# Altium PCB SFCslaver.PcbDoc (part 6 of 6)
Units mm, origin at the board's own origin, x right, y up, seen from the top; angles counter-clockwise.
Board outline 149.66 x 75.74 mm, 2 copper layers (Top Layer, Bottom Layer); 284 components, 212 nets, 830 pads, 310 vias.
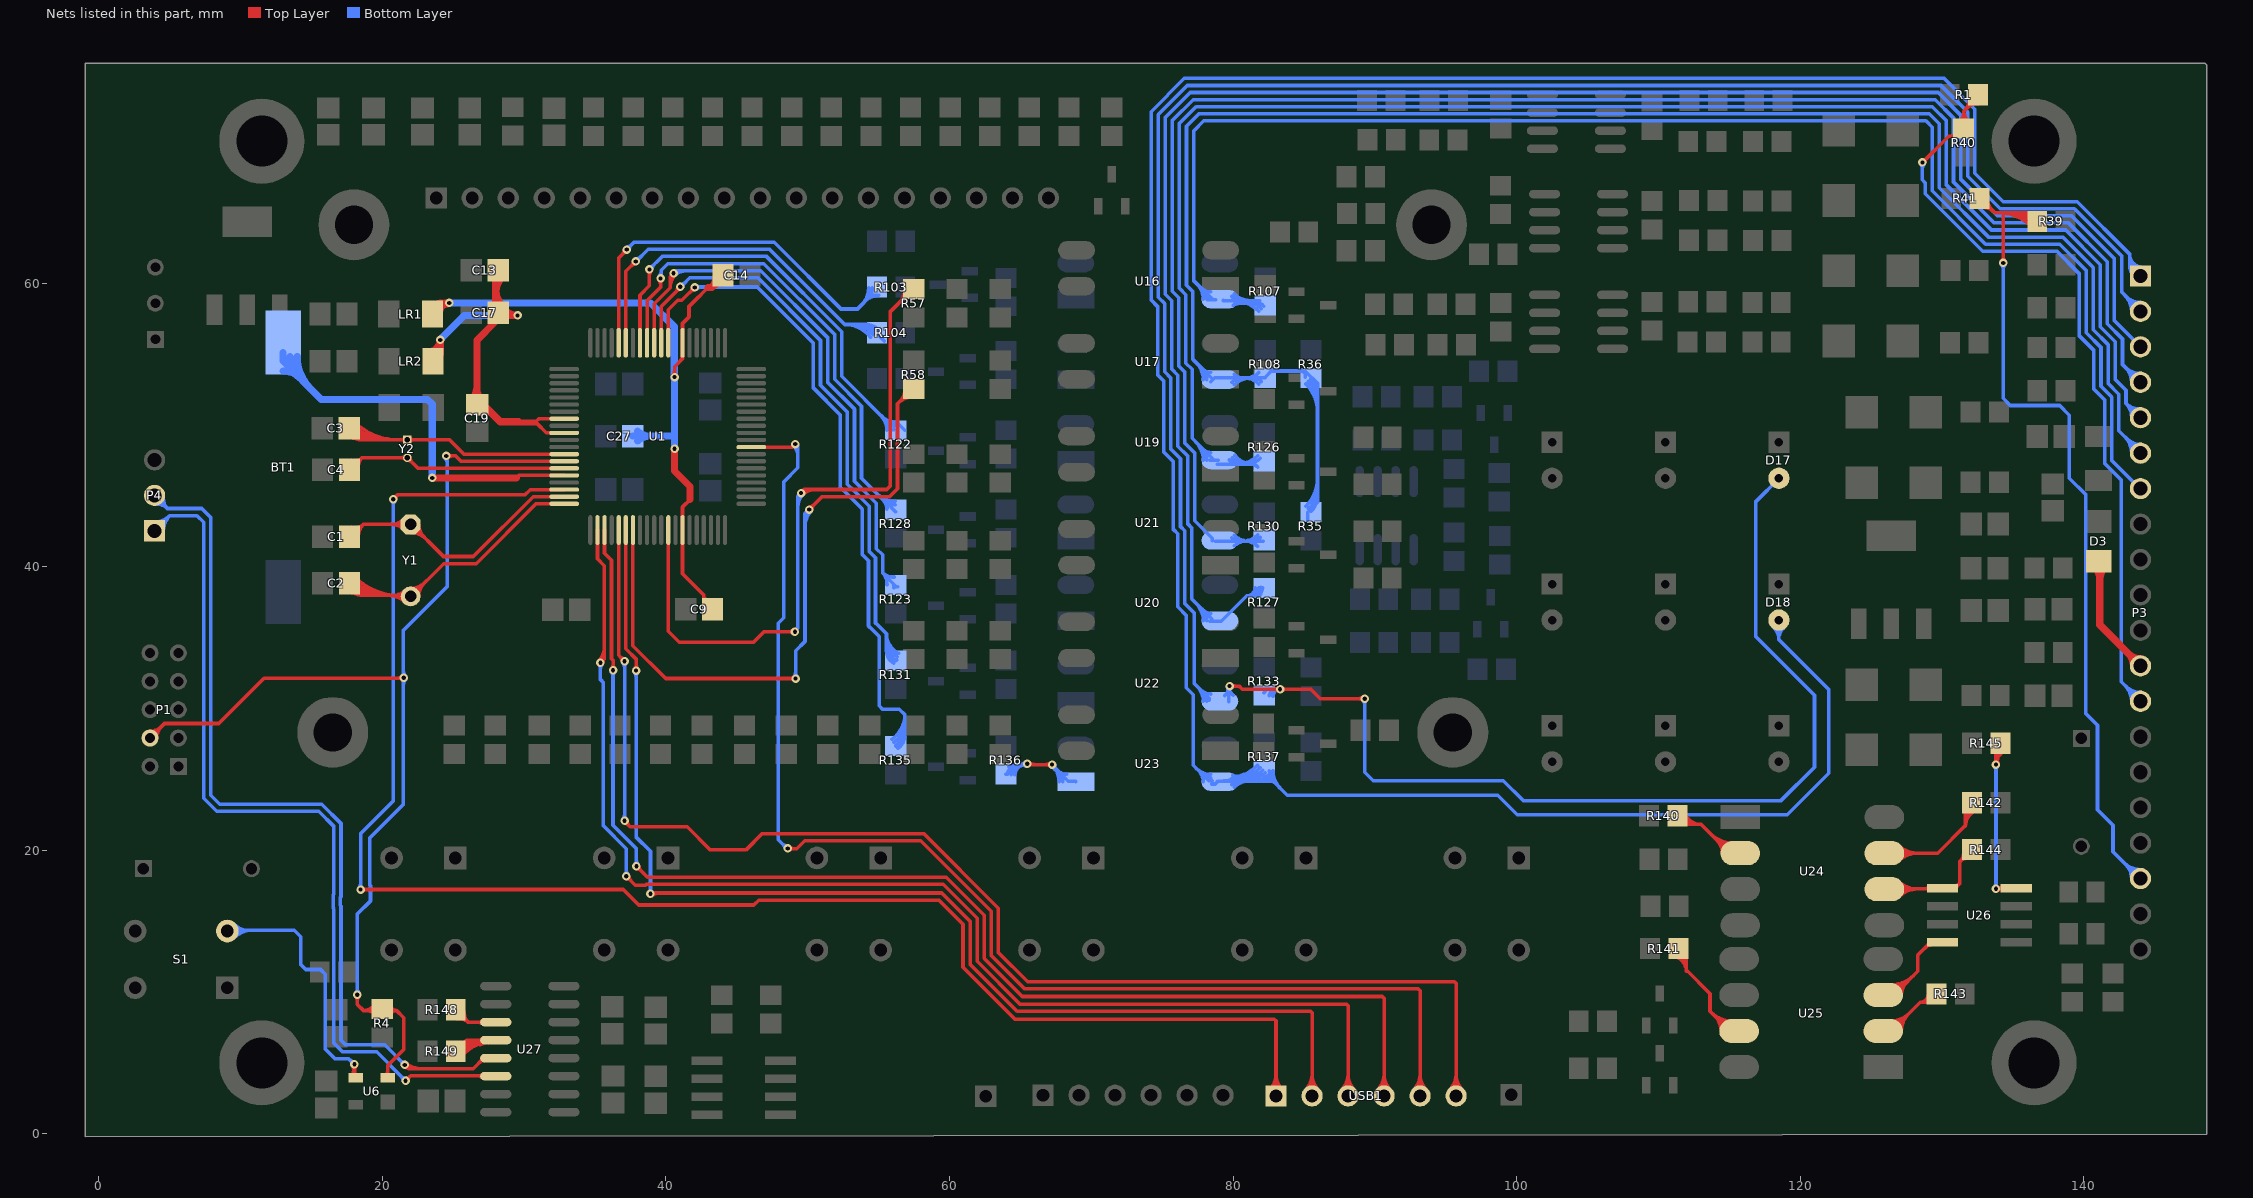
[diagram p6: the nets of this part, all layers, seen from the top]

## Via types
v1: diameter 0.6, hole 0.3, Top Layer to Bottom Layer, 310 vias

## Nets (pads, with @x,y where several pads share a name; then routed paths per layer and width w, separated by ;. In a path a pad name is that pad's centre, name@x,y a point inside that pad or via, vN(x,y) a via of type N, cw(c..) or ccw(c..) an arc to the next point about the centre after c; other vN are vias at no path point) (continued)
NetR136_2: R136.2 U23.1 | length 17.7
  Top Layer w0.254: v1@65.456,26.137 65.557,26.035 67.132,26.035 v1@67.208,26.111 ; v1@65.604,26.208 ccw(c66.021,26.626) 66.021,26.035 ; v1@67.111,25.913 ccw(c66.816,25.617) 66.816,26.035 ccw(c66.816,26.453) v1@67.111,26.157
  Bottom Layer w0.254: R136.2@63.984,25.344 64.104,25.344 64.821,26.06 ; R136.2@64.099,25.34 cw(c64.865,25.293) 64.865,26.06 ; R136.2@64.19,25.896 ccw(c64.365,26.517) 64.821,26.06 ; R136.2@64.353,25.325 cw(c65.135,25.277) 65.135,26.06 ; R136.2@64.603,25.418 cw(c65.363,25.518) 64.821,26.06 ; R136.2@64.606,25.309 cw(c65.405,25.26) v1@65.405,26.06 ; 65.002,26.06 ccw(c65.002,26.565) v1@65.359,26.208 ; 65.068,25.97 ccw(c64.955,26.389) v1@65.331,26.172 ; 65.09,25.976 cw(c65.194,25.588) v1@65.395,25.936 ; 65.125,26.06 cw(c65.125,25.729) v1@65.359,25.963 ; v1(65.481,26.086) 65.481,26.137 v1@65.405,26.06 ; v1@67.189,25.868 cw(c67.085,25.481) 67.432,25.681 ; v1@67.234,25.862 cw(c67.234,25.506) 67.486,25.758 ; v1(67.234,26.035) 67.183,26.035 67.132,26.086 67.234,26.086 67.234,26.01 68.377,24.867 68.885,24.867 68.912,24.839 U23.1@68.912,24.82 ; v1@67.255,25.988 cw(c66.087,24.82) U23.1@67.739,24.82 ; v1@67.401,25.99 ccw(c67.821,25.878) 67.444,25.661 ; v1@67.407,26.035 ccw(c67.886,26.035) 67.547,25.696 ; 67.645,25.599 ccw(c68.262,26.216) U23.1@68.262,25.343 ; 67.689,25.555 cw(c66.954,24.82) U23.1@67.993,24.82 ; 64.821,26.06 v1@65.405,26.06
NetR140_1: R140.1 U24.2 | length 14.3
  Top Layer w0.254: R140.1@111.162,22.309 ccw(c111.883,22.594) R140.1@111.883,21.819 ; R140.1@111.277,22.428 R140.1@111.338,22.428 111.947,21.819 113.005,21.819 ; R140.1@111.398,22.402 ccw(c112.257,22.742) 112.257,21.819 ; R140.1@111.634,22.496 ccw(c112.631,22.89) 112.631,21.819 ; R140.1@111.87,22.589 ccw(c113.005,23.039) 113.005,21.819 ; 113.67,21.153 ccw(c115.223,22.706) U24.2@115.223,20.51 ; 114.104,20.719 ccw(c115.223,21.838) U24.2@115.223,20.256 ; 114.121,20.702 cw(c113.205,19.787) U24.2@114.5,19.787 ; U24.2@115.773,19.787 115.037,19.787 113.005,21.819
NetR141_2: R141.2 U25.7 | length 16.9
  Top Layer w0.254: R141.2@111.235,12.461 cw(c110.906,11.456) 111.963,11.456 ; R141.2@111.314,12.702 cw(c111.021,11.807) 111.963,11.807 ; R141.2@111.394,12.944 cw(c111.136,12.158) 111.963,12.158 ; R141.2@111.414,13.056 111.963,12.506 111.963,11.557 113.64,9.881 113.64,8.636 115.062,7.214 115.57,7.214 U25.7@115.621,7.163 ; R141.2@111.473,13.185 cw(c111.251,12.508) R141.2@111.963,12.508 ; 113.724,8.551 ccw(c115.147,9.974) U25.7@115.147,7.962 ; 113.991,8.285 cw(c112.945,7.239) U25.7@114.424,7.239 ; 114.158,8.118 ccw(c115.147,9.107) U25.7@115.147,7.708 ; 114.424,7.851 cw(c113.812,7.239) U25.7@114.678,7.239
NetR142_2: R142.2 U24.7 | length 16.6
  Top Layer w0.254: U24.7@125.933,19.787 129.692,19.787 131.648,21.742 131.648,22.86 132.029,23.241 R142.2@132.41,23.241 ; U24.7@126.815,19.455 cw(c127.615,18.654) 127.615,19.787 cw(c127.615,20.919) U24.7@126.815,20.118 ; U24.7@126.994,19.275 cw(c128.229,18.041) 128.229,19.787 cw(c128.229,21.532) U24.7@126.994,20.298 ; 131.648,21.672 cw(c132.854,21.672) R142.2@132.357,22.77 ; 131.648,22.065 cw(c132.676,22.065) R142.2@132.253,23.002 ; 131.648,22.459 cw(c132.498,22.459) R142.2@132.148,23.233
NetR143_1: R143.1 U25.2 | length 12.4
  Top Layer w0.254: U25.2@125.857,7.315 126.492,7.315 126.594,7.214 126.416,7.214 128.473,9.271 ; U25.2@126.407,7.708 ccw(c126.407,8.923) 127.266,8.064 ; U25.2@126.407,7.962 ccw(c126.407,9.79) 127.7,8.497 ; U25.2@126.876,7.239 cw(c127.926,7.239) 127.183,7.981 ; U25.2@127.13,7.239 cw(c128.793,7.239) 127.617,8.415 ; 128.733,9.271 ccw(c128.733,9.826) R143.1@129.288,9.813 ; R143.1@128.993,9.271 ccw(c128.993,9.82) R143.1@129.542,9.807 ; R143.1@129.034,9.819 cw(c128.473,9.832) 128.473,9.271 ; R143.1@129.616,9.906 128.981,9.271 128.473,9.271
NetR144_2: R144.2 U24.6 U26.1 | length 15.7
  Top Layer w0.254: U24.6@125.933,17.247 126.467,17.247 126.492,17.272 U26.1@130.048,17.272 ; U24.6@126.815,16.915 cw(c127.677,16.053) 127.677,17.272 ; U24.6@126.815,17.578 ccw(c127.554,18.318) 127.554,17.272 ; U24.6@126.994,16.735 cw(c128.29,15.44) 128.29,17.272 ; U24.6@126.994,17.758 ccw(c128.167,18.931) 128.167,17.272 ; 128.76,17.272 ccw(c128.76,17.776) U26.1@129.116,17.42 ; 128.882,17.272 cw(c128.882,16.941) U26.1@129.116,17.175 ; U26.1@130.039,17.297 130.886,17.297 131.267,17.678 131.267,19.202 ; U26.1@130.839,17.47 ccw(c130.839,18.002) 131.215,17.626 ; U26.1@131.012,17.297 cw(c131.315,17.297) U26.1@131.101,17.512 ; R144.2@131.55,19.953 cw(c130.58,19.889) 131.267,19.202 ; R144.2@132.01,19.428 ccw(c131.851,18.619) 131.267,19.202 ; R144.2@132.105,20.041 131.267,19.202
NetR145_2: R145.2 U26.8 | length 19.1
  Top Layer w0.254: v1@133.685,26.157 ccw(c133.39,26.453) 133.807,26.453 ccw(c134.225,26.453) v1@133.93,26.157 ; v1@133.721,26.185 ccw(c133.497,26.572) 133.929,26.456 ; v1(133.807,17.272) 133.833,17.297 U26.8@135.239,17.297 ; v1@133.807,26.001 cw(c134.916,26.001) R145.2@134.392,26.979 ; v1(133.807,26.035) R145.2@133.807,27.559 ; 133.807,26.426 cw(c134.688,26.426) R145.2@134.272,27.202 ; R145.2@133.807,26.85 cw(c134.461,26.85) R145.2@134.152,27.426 ; 133.918,26.416 ccw(c134.293,26.315) v1@133.957,26.122 ; v1@133.923,17.401 ccw(c134.107,17.606) U26.8@134.178,17.34 ; v1@133.93,17.15 cw(c134.286,16.793) U26.8@134.286,17.297 ; v1@133.93,17.394 ccw(c134.164,17.628) U26.8@134.164,17.297 ; v1@133.957,17.186 cw(c134.228,17.029) U26.8@134.147,17.331 ; U26.8@134.316,17.175 ccw(c134.021,16.88) 134.021,17.297 ccw(c134.021,17.715) U26.8@134.316,17.42
  Bottom Layer w0.254: v1@133.685,17.394 ccw(c133.39,17.69) 133.807,17.69 ccw(c134.225,17.69) v1@133.93,17.394 ; v1@133.685,25.913 cw(c133.39,25.617) 133.807,25.617 cw(c134.225,25.617) v1@133.93,25.913 ; v1@133.807,17.221 v1(133.807,26.035)
NetR148_2: R148.2 U27.11 | length 6.3
  Top Layer w0.254: R148.2@25.181,8.738 26.07,7.849 ; R148.2@25.225,8.372 cw(c25.304,7.804) R148.2@25.709,8.209 ; R148.2@25.26,8.12 cw(c25.392,7.171) 26.07,7.849 ; R148.2@25.753,8.663 ccw(c26.836,8.615) 26.07,7.849 ; 26.725,7.849 ccw(c26.725,8.353) U27.11@27.081,7.996 ; 26.847,7.849 cw(c26.847,7.518) U27.11@27.081,7.752 ; U27.11@28.143,7.849 26.07,7.849
NetR149_2: R149.2 U27.12 | length 16.3
  Top Layer w0.254: R149.2@25.04,5.992 cw(c26.345,4.832) 26.345,6.579 ; R149.2@25.181,5.817 25.943,6.579 ; R149.2@25.229,5.823 cw(c26.911,4.33) U27.12@26.911,6.579 ; R149.2@25.334,6.419 ccw(c25.502,7.02) 25.943,6.579 ; R149.2@25.419,5.655 cw(c27.476,3.827) U27.12@27.476,6.579 ; R149.2@25.609,5.486 cw(c28.041,3.325) U27.12@28.041,6.579 ; R149.2@25.746,5.962 cw(c26.442,6.079) 25.943,6.579 ; 26.3,6.112 ccw(c25.979,7.311) U27.12@27.054,6.69 ; 26.608,6.361 ccw(c26.431,7.067) U27.12@27.055,6.693 ; 26.725,6.579 ccw(c26.725,7.083) U27.12@27.081,6.726 ; 26.728,6.547 cw(c26.814,6.051) U27.12@27.104,6.463 ; 26.848,6.568 ccw(c26.791,6.895) U27.12@27.062,6.704 ; 26.847,6.579 cw(c26.847,6.248) U27.12@27.081,6.482 ; 26.892,6.271 ccw(c26.73,6.878) U27.12@27.274,6.564 ; U27.12@27.485,6.429 ccw(c27.481,6.444) U27.12@27.494,6.437 ; U27.12@28.042,6.579 25.943,6.579
NetS1_2: S1.2 U6.3 | length 24.6
  Top Layer w0.254: U6.3@17.813,4.087 ccw(c17.28,4.62) v1@18.034,4.62 ; v1@17.891,4.805 cw(c17.45,4.504) 17.966,4.365 ; v1@17.912,4.78 cw(c17.616,4.485) 18.034,4.485 cw(c18.452,4.485) v1@18.156,4.78 ; U6.3@18.034,3.937 v1(18.034,4.902)
  Bottom Layer w0.254: S1.2@9.068,14.376 9.093,14.351 13.792,14.351 14.249,13.894 14.249,11.938 14.605,11.582 15.646,11.582 15.977,11.252 15.977,5.969 16.67,5.276 17.635,5.276 18.034,4.877 v1(18.034,4.902) ; S1.2@9.363,13.997 cw(c10.217,13.143) 10.217,14.351 ; S1.2@9.363,14.59 ccw(c9.94,15.167) 9.94,14.351 ; S1.2@9.542,13.818 cw(c10.83,12.53) 10.83,14.351 ; S1.2@9.542,14.769 ccw(c10.553,15.78) 10.553,14.351 ; 17.695,5.215 ccw(c18.034,5.554) v1@18.034,5.075 ; 17.757,5.154 cw(c17.505,4.902) v1@17.861,4.902
NetU25_3: U25.3 U26.4 | length 11.1
  Top Layer w0.254: U25.3@125.832,9.703 126.543,9.703 128.295,11.455 128.295,12.598 U26.4@129.184,13.487 ; U25.3@126.407,9.994 ccw(c126.407,11.025) 127.136,10.296 ; U25.3@126.407,10.248 ccw(c126.407,11.892) 127.57,10.73 ; U25.3@126.407,10.502 ccw(c126.407,12.759) 128.003,11.163 ; U25.3@127.13,9.779 cw(c128.364,9.779) 127.491,10.651 ; 128.851,13.154 cw(c129.239,12.765) U26.4@129.239,13.314 ; U26.4@128.982,13.285 ccw(c128.779,13.487) U26.4@129.066,13.487
PLUS_IN_CAP: R57.2 U1.32 | length 55.7
  Top Layer w0.254: U1.32@40.173,42.579 40.173,35.443 40.945,34.671 46.177,34.671 46.914,35.408 49.073,35.408 49.098,35.433 v1(49.098,35.408) ; v1@48.976,35.285 ccw(c48.681,34.99) 48.681,35.408 ccw(c48.681,35.825) v1@48.976,35.53 ; v1@49.473,45.244 cw(c49.931,44.786) 49.931,45.434 ; v1(49.53,45.187) 49.53,45.212 49.752,45.434 ; v1@49.546,45.359 ccw(c49.569,45.616) 49.752,45.434 ; v1@49.652,45.064 cw(c50.544,44.173) 50.544,45.434 ; v1@49.697,45.231 cw(c49.9,45.285) 49.752,45.434 ; 56.429,58.588 cw(c57.432,57.585) R57.2@57.432,59.004 ; 56.464,58.623 ccw(c55.51,59.577) R57.2@56.859,59.577 ; R57.2@56.863,59.022 cw(c57.432,58.453) R57.2@57.432,59.258 ; R57.2@56.898,59.057 ccw(c56.378,59.577) R57.2@57.113,59.577 ; R57.2@57.05,59.364 R57.2@57.634,59.364 ; R57.2@57.482,59.577 57.443,59.538 57.379,59.538 55.835,57.994 55.835,45.7 55.568,45.434 49.752,45.434
  Bottom Layer w0.254: v1@49.098,35.458 49.309,35.669 49.309,44.965 49.543,45.199 49.555,45.187 v1(49.53,45.187) ; 49.309,44.235 cw(c50.482,44.235) v1@49.652,45.064 ; 49.309,44.848 cw(c49.868,44.848) v1@49.473,45.244
PLUS_IN_PORT: P3.13 R1.1 R40.2 | length 64.1
  Top Layer w0.254: v1(128.626,68.504) 130.48,70.358 131.267,70.358 131.521,70.612 131.547,70.612 131.547,72.111 ; v1@128.626,68.677 ccw(c128.626,69.094) 128.921,68.799 ccw(c129.216,68.504) v1@128.799,68.504 ; R40.2@131.194,71.332 ccw(c130.511,72.111) 131.547,72.111 ; 131.771,72.335 cw(c132.547,71.559) R1.1@132.547,72.656 ; R40.2@131.919,71.356 cw(c132.497,72.111) 131.547,72.111 ; 131.956,72.52 ccw(c131.299,73.178) R1.1@132.228,73.216 ; R1.1@131.974,73.206 cw(c130.512,73.146) 131.547,72.111 ; R1.1@132.588,73.33 132.588,73.152 131.547,72.111
  Bottom Layer w0.254: v1@128.503,68.381 cw(c128.269,68.147) 128.6,68.147 ; 128.6,68.025 cw(c129.105,68.025) v1@128.748,68.381 ; v1@128.6,68.504 128.6,67.272 128.816,67.057 128.816,66.295 132.876,62.234 138.109,62.234 139.669,60.674 139.669,56.294 140.718,55.246 140.718,52.511 141.48,51.749 141.48,47.273 142.646,46.107 142.646,31.877 P3.13@144.023,30.5 ; v1@128.753,68.504 v1@128.778,68.529 ; 142.92,31.603 cw(c141.816,30.5) P3.13@143.377,30.5 ; 142.976,31.547 ccw(c144,32.571) P3.13@144,31.123 ; 143.354,31.17 cw(c142.684,30.5) P3.13@143.631,30.5 ; 143.41,31.113 ccw(c144,31.703) P3.13@144,30.869
PLUS_POWER_PORT: D3.2 P3.12 | length 12.9
  Top Layer w0.508: D3.2@140.76,39.997 cw(c139.886,39.122) 141.122,39.122 ; 141.122,39.007 cw(c142.522,39.007) D3.2@141.532,39.997 ; D3.2@141.122,40.792 141.122,35.89 P3.12@144.018,32.995 ; 143.144,33.868 cw(c142.276,33) P3.12@143.504,33 ; 143.175,33.838 ccw(c144,34.663) P3.12@144,33.496
RELAY_L1: R131.1 U1.70 | length 48.1
  Top Layer w0.254: U1.70@39.673,55.779 39.673,58.342 40.956,59.625 v1@41.046,59.625 ; 40.69,59.359 ccw(c40.308,59.741) v1@40.848,59.741 ; 40.812,59.481 cw(c41.021,59.273) v1@41.021,59.568
  Bottom Layer w0.254: v1@41.021,59.914 ccw(c41.021,60.454) 41.403,60.072 ; v1@41.034,59.627 41.034,59.703 41.693,60.362 46.492,60.362 50.903,55.951 50.903,52.796 52.799,50.9 52.799,45.812 53.281,45.33 53.281,45.328 54.347,44.262 54.347,41.061 54.785,40.623 54.785,36.02 ; v1@41.194,59.741 cw(c41.489,59.741) 41.28,59.949 ; 54.785,36.02 54.79,36.02 55.557,35.253 ; R131.1@55.557,34.031 ccw(c56.489,34.031) R131.1@56.079,33.194 ; 55.557,34.438 ccw(c56.689,34.438) R131.1@56.191,33.422 ; 55.557,34.845 ccw(c56.888,34.845) R131.1@56.302,33.65 ; R131.1@56.212,33.364 55.557,34.019 55.557,35.253 ; R131.1@56.276,33.418 R131.1@56.288,33.405 ; R131.1@56.414,33.878 cw(c57.088,35.253) 55.557,35.253
  other v1: 41.021,59.741
RELAY_L1_PORT: D17.2 P3.2 R133.1 U22.4 | length 212.3
  Top Layer w0.254: v1(79.756,31.572) 80.416,31.572 80.645,31.344 85.496,31.344 86.157,30.683 v1@89.306,30.683 ; v1@79.878,31.45 cw(c80.174,31.155) 80.174,31.572 cw(c80.174,31.99) v1@79.878,31.695 ; v1@83.19,31.221 ccw(c82.894,30.926) 82.894,31.344 ccw(c82.894,31.761) v1@83.19,31.466 ; v1@83.434,31.221 cw(c83.73,30.926) 83.73,31.344 cw(c83.73,31.761) v1@83.434,31.466 ; v1@89.159,30.561 ccw(c88.863,30.266) 88.863,30.683 ccw(c88.863,31.101) v1@89.159,30.806
  Bottom Layer w0.254: 77.457,31.56 cw(c76.39,30.493) U22.4@77.899,30.493 ; 77.704,31.313 ccw(c78.422,32.032) U22.4@78.422,31.016 ; 77.891,31.126 cw(c77.257,30.493) U22.4@78.153,30.493 ; U22.4@78.302,30.588 78.302,30.715 77.267,31.75 77.267,36.728 76.597,37.398 76.597,42.52 76.293,42.825 76.293,47.603 75.608,48.287 75.608,53.297 75.175,53.73 75.175,58.55 74.721,59.004 74.721,71.88 76.773,73.931 129.935,73.931 131.81,72.056 131.81,67.535 134.109,65.236 139.341,65.236 142.672,61.905 142.672,59.36 P3.2@144.014,58.018 ; U22.4@79.403,30.907 ccw(c78.93,31.521) v1@79.705,31.521 ; U22.4@79.591,31.094 cw(c80.113,30.955) v1@79.842,31.422 ; v1@79.606,31.486 cw(c79.351,31.338) 79.636,31.262 ; U22.4@79.705,30.455 v1@79.705,31.521 ; U22.4@79.705,31.032 cw(c80.296,31.032) v1@79.878,31.45 ; v1(79.756,31.572) v1@79.705,31.521 ; 79.775,31.262 cw(c79.912,31.299) v1@79.842,31.422 ; U22.4@80.019,30.923 cw(c80.432,31.521) v1@79.705,31.521 ; R133.1@82.169,31.09 82.423,31.344 v1(83.312,31.344) ccw(c83.312,30.848) R133.1@82.817,30.873 ; R133.1@82.563,30.886 cw(c83.045,30.861) v1@83.045,31.344 ; R133.1@82.919,31.31 cw(c82.986,31.06) v1@83.182,31.23 ; v1@83.19,31.221 ccw(c82.894,30.926) 82.894,31.344 ccw(c82.894,31.761) v1@83.19,31.466 ; v1@89.159,30.561 cw(c88.863,30.266) 89.281,30.266 cw(c89.699,30.266) v1@89.403,30.561 ; v1(89.281,30.683) 89.281,25.502 89.891,24.892 99.066,24.892 100.461,23.497 118.645,23.497 121.006,25.857 121.006,30.918 116.879,35.058 116.879,44.593 D17.2@118.514,46.228 ; 142.914,59.117 cw(c141.797,58) P3.2@143.377,58 ; 142.99,59.041 ccw(c144,60.051) P3.2@144,58.623 ; 143.348,58.684 cw(c142.664,58) P3.2@143.631,58 ; 143.424,58.608 ccw(c144,59.184) P3.2@144,58.369
RELAY_L2: R135.1 U1.69 | length 54.5
  Top Layer w0.254: U1.69@40.173,55.779 40.173,58.105 40.843,58.776 41.123,58.776 v1@42.05,59.703 ; v1@41.864,59.69 cw(c41.446,59.69) 41.742,59.395 cw(c42.037,59.099) v1@42.037,59.517
  Bottom Layer w0.254: v1@42.037,59.715 46.433,59.715 50.404,55.745 50.404,52.589 52.3,50.693 52.3,45.605 52.782,45.123 52.782,45.121 53.848,44.055 53.848,40.854 54.286,40.417 54.286,35.814 54.579,35.521 54.584,35.521 55.042,35.063 55.042,30.175 55.27,29.947 56.464,29.947 56.845,29.566 ; v1@42.159,59.568 cw(c42.516,59.211) 42.516,59.715 ; v1@42.159,59.812 ccw(c42.393,60.046) 42.393,59.715 ; R135.1@55.933,27.813 ccw(c54.706,29.566) 56.845,29.566 ; R135.1@56.079,27.605 ccw(c55.048,29.077) 56.845,29.077 ; R135.1@56.212,27.344 56.49,27.622 56.49,27.61 56.845,27.965 56.845,29.566 ; R135.1@56.225,27.397 ccw(c55.39,28.589) 56.845,28.589 ; R135.1@56.37,27.189 ccw(c55.731,28.101) 56.845,28.101
  other v1: 42.037,59.69
RELAY_L2_PORT: D18.2 P3.1 R137.1 U23.4 | length 223.6
  Bottom Layer w0.254: 77.414,25.76 ccw(c78.422,26.768) U23.4@78.422,25.343 ; 77.577,25.598 cw(c76.799,24.82) U23.4@77.899,24.82 ; 77.848,25.327 ccw(c78.422,25.901) U23.4@78.422,25.089 ; U23.4@78.488,24.668 78.742,24.668 78.945,24.871 82.825,24.871 ; U23.4@78.513,24.896 78.279,24.896 77.191,25.984 77.191,30.963 76.708,31.445 76.708,36.551 76.098,37.16 76.098,42.314 75.794,42.618 75.794,47.396 75.109,48.081 75.109,53.09 74.676,53.524 74.676,58.344 74.222,58.798 74.222,72.086 76.566,74.43 130.141,74.43 132.309,72.263 132.309,67.742 134.315,65.735 139.548,65.735 143.231,62.052 ; U23.4@79.016,24.871 ccw(c79.016,28.723) R137.1@81.739,25.999 ; U23.4@79.629,24.871 ccw(c79.629,28.109) R137.1@81.919,25.819 ; U23.4@79.883,25.036 ccw(c80.311,25.609) 80.433,24.904 ; U23.4@79.912,24.63 cw(c80.494,24.048) 80.494,24.871 ; U23.4@79.951,24.679 cw(c80.712,24.213) 80.504,25.081 ; U23.4@79.96,24.695 cw(c81.102,24.093) 80.768,25.34 ; U23.4@79.984,25.273 ccw(c80.219,25.681) 80.341,25.226 ; U23.4@79.995,25.266 ccw(c80.528,26.135) 80.766,25.144 ; U23.4@80.035,25.239 ccw(c80.798,26.261) 81.015,25.004 ; U23.4@80.092,24.45 cw(c81.107,23.435) 81.107,24.871 ; U23.4@80.092,25.19 ccw(c80.862,25.96) 80.862,24.871 ; U23.4@80.149,24.518 cw(c81.074,23.866) 80.882,24.981 ; U23.4@80.168,24.547 cw(c81.451,23.76) 81.1,25.224 ; U23.4@80.242,24.871 ccw(c80.242,27.496) R137.1@82.098,25.64 ; 80.855,24.871 ccw(c80.855,26.883) R137.1@82.278,25.46 ; 81.468,24.871 ccw(c81.468,26.27) R137.1@82.458,25.281 ; 82.082,24.871 ccw(c82.082,25.657) R137.1@82.637,25.101 ; R137.1@82.244,25.021 cw(c82.244,23.981) 82.98,24.716 ; R137.1@82.337,25.028 cw(c82.427,24.473) 82.825,24.871 ; R137.1@82.563,25.594 ccw(c83.677,25.594) 82.89,24.806 ; 82.695,24.871 ccw(c82.695,25.043) R137.1@82.817,24.921 ; R137.1@82.754,25.331 ccw(c83.104,25.15) 82.825,24.871 ; R137.1@82.817,25.594 ccw(c84.544,25.594) 83.323,24.373 ; D18.2@118.084,35.766 cw(c117.272,34.86) 118.489,34.86 ; D18.2@118.254,35.955 cw(c117.782,35.429) 118.489,35.429 ; 118.489,35.409 cw(c119.197,35.409) D18.2@118.739,35.949 ; D18.2@118.489,36.199 118.489,34.86 ; D18.2@118.903,35.755 ccw(c119.662,34.86) 118.489,34.86 ; 143.231,61.203 ccw(c144.076,61.203) P3.1@143.985,60.362 ; 143.231,61.486 ccw(c144.107,61.486) P3.1@144.012,60.614 ; 143.231,61.769 ccw(c144.138,61.769) P3.1@144.04,60.867 ; P3.1@143.397,60.656 ccw(c142.781,60.815) 143.231,61.265 ; P3.1@143.839,61.102 cw(c143.676,61.71) 143.231,61.265 ; P3.1@143.993,60.503 143.231,61.265 ; P3.1@144.067,61.119 cw(c144.169,62.052) 143.231,62.052 ; 82.825,24.871 83.829,23.867 98.679,23.867 100.048,22.499 119.095,22.499 122.022,25.425 122.022,31.327 118.489,34.86 ; 143.231,61.265 143.231,62.052
RELAY_M1: R103.1 U1.76 | length 31.5
  Top Layer w0.254: U1.76@36.673,55.779 36.673,61.768 37.236,62.332 v1(37.236,62.357) ; 36.923,62.018 ccw(c36.584,62.357) v1@37.063,62.357 ; 36.984,62.08 cw(c37.236,61.828) v1@37.236,62.184
  Bottom Layer w0.254: v1(37.236,62.357) 37.752,62.872 47.643,62.872 52.349,58.166 53.518,58.166 54.483,59.131 R103.1@54.991,59.131 ; v1@37.236,62.53 ccw(c37.236,62.948) 37.532,62.652 ccw(c37.827,62.357) v1@37.409,62.357 ; 53.805,58.453 ccw(c52.592,59.665) R103.1@54.307,59.665 ; 54.136,58.784 cw(c54.88,58.04) R103.1@54.88,59.092 ; 54.238,58.887 ccw(c53.46,59.665) R103.1@54.561,59.665
RELAY_M1_PORT: P3.7 R107.1 U16.4 | length 116
  Bottom Layer w0.254: 77.447,59.948 cw(c76.355,58.856) U16.4@77.899,58.856 ; 77.728,59.666 ccw(c78.422,60.36) U16.4@78.422,59.379 ; 77.88,59.514 cw(c77.222,58.856) U16.4@78.153,58.856 ; U16.4@78.183,58.831 U16.4@78.767,58.831 ; U16.4@78.513,58.881 77.216,60.179 77.216,70.714 77.939,71.436 128.868,71.436 129.315,70.99 129.315,66.502 133.075,62.741 138.307,62.741 140.168,60.881 140.168,56.501 141.217,55.452 141.217,52.718 141.979,51.956 141.979,47.48 143.993,45.466 P3.7@144.501,45.466 ; U16.4@79.301,58.78 79.326,58.754 R107.1@81.891,58.754 ; U16.4@79.912,59.046 ccw(c80.617,59.751) 80.617,58.754 ; U16.4@79.949,59 ccw(c80.603,59.412) 80.433,58.658 ; U16.4@80.001,58.414 cw(c80.609,57.451) 80.86,58.562 ; U16.4@80.007,58.754 cw(c80.007,56.197) R107.1@81.815,58.005 ; U16.4@80.092,58.486 cw(c80.739,57.839) 80.739,58.754 ; U16.4@80.092,59.226 ccw(c81.23,60.364) 81.23,58.754 ; U16.4@80.164,59.135 ccw(c81.336,59.875) 81.031,58.523 ; 80.62,58.754 cw(c80.62,56.81) R107.1@81.995,58.185 ; 81.234,58.754 cw(c81.234,57.424) R107.1@82.175,58.365
RELAY_M2: R104.1 U1.75 | length 34.1
  Top Layer w0.254: U1.75@37.173,55.779 37.173,60.82 v1@37.884,61.531 ; v1@37.698,61.519 cw(c37.281,61.519) 37.576,61.223 cw(c37.871,60.928) v1@37.871,61.346 ; v1@37.846,61.544 v1@37.871,61.544
  Bottom Layer w0.254: v1@37.871,61.692 ccw(c37.871,62.171) 38.21,61.832 ; v1@37.897,61.519 38.751,62.373 47.304,62.373 52.603,57.074 ; v1@38.044,61.519 cw(c38.401,61.519) 38.149,61.771 ; 53.126,57.074 cw(c53.126,55.163) R104.1@54.629,56.343 ; 53.648,57.074 cw(c53.648,55.573) R104.1@54.829,56.499 ; 54.17,57.074 cw(c54.17,55.983) R104.1@55.029,56.656 ; R104.1@54.429,56.186 ccw(c52.604,54.753) 52.604,57.074 ; R104.1@55.393,55.911 54.23,57.074 52.603,57.074
  other v1: 37.871,61.519
RELAY_M2_PORT: P3.6 R35.1 R36.2 R108.1 U17.4 | length 145.5
  Bottom Layer w0.254: 77.405,54.376 cw(c76.212,53.183) U17.4@77.899,53.183 ; 77.829,53.952 ccw(c78.422,54.544) U17.4@78.422,53.706 ; 77.838,53.943 cw(c77.079,53.183) U17.4@78.153,53.183 ; U17.4@78.437,53.039 78.712,53.315 R108.1@82.271,53.315 ; U17.4@78.564,53.217 77.171,54.61 77.171,59.377 76.717,59.831 76.717,71.053 77.6,71.935 129.108,71.935 129.814,71.23 129.814,66.708 133.282,63.24 138.514,63.24 140.667,61.088 140.667,56.708 141.716,55.659 141.716,52.925 142.478,52.163 142.478,49.572 P3.6@144.065,47.985 ; U17.4@79.912,52.993 cw(c80.688,52.217) 80.688,53.315 ; U17.4@80.092,52.814 cw(c81.302,51.604) 81.302,53.315 ; U17.4@80.092,53.553 ccw(c80.668,54.129) 80.668,53.315 ; 80.753,53.315 cw(c80.753,51.812) R108.1@81.815,52.875 ; 80.921,53.315 ccw(c80.921,54.579) R108.1@81.815,53.685 ; 81.366,53.315 cw(c81.366,52.426) R108.1@81.995,53.054 ; R108.1@82.296,53.391 82.702,53.797 84.887,53.797 85.09,53.594 R36.2@85.09,53.34 ; R36.2@85.103,53.785 85.954,52.934 85.954,44.526 85.258,43.831 R35.1@85.258,43.256 ; R35.1@85.141,44.255 ccw(c83.18,46.216) 85.954,46.216 ; R36.2@85.141,52.875 cw(c83.18,50.913) 85.954,50.913 ; R35.1@85.321,44.075 ccw(c83.793,45.603) 85.954,45.603 ; R36.2@85.321,53.054 cw(c83.793,51.527) 85.954,51.527 ; R35.1@85.5,43.896 ccw(c84.406,44.99) 85.954,44.99 ; R36.2@85.5,53.234 cw(c84.406,52.14) 85.954,52.14 ; 142.902,49.148 cw(c141.754,48) P3.6@143.377,48 ; 143.021,49.029 ccw(c144,50.008) P3.6@144,48.623 ; 143.335,48.714 cw(c142.621,48) P3.6@143.631,48 ; 143.454,48.595 ccw(c144,49.141) P3.6@144,48.369
RELAY_S1: R122.1 U1.73 | length 35.6
  Top Layer w0.254: U1.73@38.173,55.779 38.173,59.135 38.837,59.799 v1(38.837,60.96) ; v1@38.714,60.838 cw(c38.419,60.542) 38.837,60.542 cw(c39.254,60.542) v1@38.959,60.838
  Bottom Layer w0.254: v1(38.837,60.96) 39.751,61.874 47.097,61.874 52.4,56.571 52.4,53.416 55.632,50.184 55.632,49.962 55.923,49.671 R122.1@56.11,49.671 ; v1@38.837,61.133 ccw(c38.837,61.551) 39.132,61.255 ccw(c39.427,60.96) v1@39.01,60.96 ; 55.159,50.657 cw(c54.122,49.62) R122.1@55.589,49.62 ; 55.243,50.574 ccw(c56.162,51.493) R122.1@56.162,50.193 ; R122.1@55.593,50.223 cw(c54.989,49.62) R122.1@55.843,49.62 ; R122.1@55.676,50.14 ccw(c56.162,50.625) R122.1@56.162,49.939 ; R122.1@56.288,50.118 56.339,50.118 R122.1@56.838,49.62
RELAY_S1_PORT: P3.5 R126.1 U19.4 | length 126
  Bottom Layer w0.254: 77.363,48.805 cw(c76.069,47.511) U19.4@77.899,47.511 ; 77.797,48.371 cw(c76.936,47.511) U19.4@78.153,47.511 ; 77.931,48.237 ccw(c78.422,48.729) U19.4@78.422,48.034 ; U19.4@78.378,47.485 U19.4@78.767,47.485 ; U19.4@78.894,47.223 81.383,47.223 ; U19.4@78.97,47.502 78.666,47.502 77.114,49.053 77.114,53.908 76.672,54.351 76.672,59.171 76.218,59.625 76.218,71.259 77.393,72.434 129.314,72.434 130.313,71.436 130.313,66.915 133.488,63.739 138.721,63.739 141.166,61.294 141.166,56.914 142.215,55.866 142.215,53.188 142.977,52.426 142.977,51.511 ; U19.4@79.734,47.52 ccw(c80.343,47.995) 80.343,47.223 ; U19.4@79.934,47.676 ccw(c80.863,48.401) 80.863,47.223 ; U19.4@80.134,47.832 ccw(c81.383,48.807) 81.383,47.223 ; U19.4@80.293,47.223 ccw(c80.293,49.268) R126.1@81.739,47.822 ; 80.906,47.223 ccw(c80.906,48.655) R126.1@81.919,47.642 ; 81.229,47.223 cw(c81.229,46.501) R126.1@81.739,47.011 ; R126.1@81.687,47.072 ccw(c81.383,46.843) 81.383,47.223 ; P3.5@143.377,50.514 ccw(c142.009,50.543) 142.977,51.511 ; 143.386,51.102 ccw(c143.951,51.667) P3.5@143.984,50.869 ; 143.397,51.091 cw(c142.832,50.526) P3.5@143.631,50.508 ; P3.5@143.974,51.122 cw(c143.918,52.452) 142.977,51.511 ; P3.5@144.065,50.423 142.977,51.511
RELAY_S2: R128.1 U1.72 | length 39.7
  Top Layer w0.254: U1.72@38.673,55.779 38.673,58.753 39.624,59.704 v1(39.624,60.325) ; v1@39.502,60.203 cw(c39.206,59.907) 39.624,59.907 cw(c40.042,59.907) v1@39.746,60.203
  Bottom Layer w0.254: v1@39.502,60.447 ccw(c39.084,60.865) 39.675,60.865 ; v1(39.624,60.325) 39.649,60.325 39.675,60.3 39.675,60.909 40.126,61.36 46.906,61.36 51.901,56.365 51.901,53.21 53.797,51.314 53.797,46.225 54.231,45.792 54.234,45.792 55.423,44.602 ; 54.896,45.129 ccw(c56.162,46.395) R128.1@56.162,44.605 ; 55.303,44.722 cw(c54.613,44.032) R128.1@55.589,44.032 ; 55.33,44.696 ccw(c56.162,45.528) R128.1@56.162,44.351 ; R128.1@55.594,44.104 ccw(c54.999,44.179) 55.423,44.602 ; R128.1@55.888,44.535 cw(c55.7,44.88) 55.423,44.602 ; R128.1@56.212,43.854 55.464,44.602 55.423,44.602
RELAY_S2_PORT: P3.4 R130.1 U21.4 | length 126.9
  Bottom Layer w0.254: U21.4@78.539,41.838 78.539,41.99 77.291,43.238 77.291,48.016 76.606,48.701 76.606,53.71 76.173,54.144 76.173,58.964 75.719,59.418 75.719,71.466 77.186,72.933 129.521,72.933 130.812,71.643 130.812,67.122 133.695,64.238 138.928,64.238 141.665,61.501 141.665,57.121 142.732,56.054 142.732,54.245 P3.4@143.963,53.014 ; U21.4@78.742,41.787 R130.1@82.144,41.787 ; U21.4@79.912,42.028 ccw(c80.494,42.61) 80.494,41.787 ; U21.4@80.092,41.468 cw(c80.862,40.698) 80.862,41.787 cw(c80.861,40.545) R130.1@81.739,41.423 ; U21.4@80.092,42.208 ccw(c81.107,43.223) 81.107,41.787 ; 80.661,41.787 ccw(c80.661,43.312) R130.1@81.739,42.234 ; 81.274,41.787 ccw(c81.274,42.699) R130.1@81.919,42.054 ; 142.897,54.08 ccw(c144,55.183) P3.4@144,53.623 ; 142.953,54.024 cw(c141.928,53) P3.4@143.377,53 ; 143.331,53.646 ccw(c144,54.315) P3.4@144,53.369 ; 143.386,53.591 cw(c142.796,53) P3.4@143.631,53
RELAY_S3: R123.1 U1.71 | length 42.7
  Top Layer w0.254: U1.71@39.173,55.779 39.173,58.547 40.301,59.675 40.301,60.418 v1@40.551,60.668 ; 40.301,59.689 cw(c41.53,59.689) v1@40.661,60.558 ; 40.301,60.303 cw(c40.916,60.303) v1@40.481,60.738 ; v1@40.369,60.646 cw(c40.124,60.595) 40.301,60.418 cw(c40.519,60.199) v1@40.531,60.508
  Bottom Layer w0.254: v1(40.538,60.681) 40.719,60.861 46.699,60.861 51.402,56.158 51.402,53.003 53.298,51.107 53.298,46.019 53.78,45.537 53.78,45.535 54.846,44.469 54.846,41.268 55.284,40.83 55.284,39.56 ; v1@40.661,60.558 cw(c41.392,59.827) 41.392,60.861 ; R123.1@55.59,38.738 ccw(c54.537,38.813) 55.284,39.56 ; R123.1@56.085,38.52 R123.1@56.085,38.638 ; R123.1@56.104,39.268 cw(c56.001,40.278) 55.284,39.56 ; R123.1@56.339,38.587 56.257,38.587 55.284,39.56
RELAY_S3_PORT: P3.3 R127.1 U20.4 | length 129.5
  Bottom Layer w0.254: 77.369,37.445 cw(c76.089,36.165) U20.4@77.899,36.165 ; 77.803,37.011 cw(c76.956,36.165) U20.4@78.153,36.165 ; 77.916,36.898 ccw(c78.422,37.404) U20.4@78.422,36.688 ; U20.4@78.344,36.14 79.168,36.14 80.975,37.948 ; U20.4@78.488,36.199 78.488,36.326 77.096,37.718 77.096,42.727 76.792,43.032 76.792,47.81 76.107,48.494 76.107,53.504 75.674,53.937 75.674,58.757 75.22,59.211 75.22,71.673 76.98,73.432 129.728,73.432 131.311,71.85 131.311,67.328 133.902,64.737 139.134,64.737 142.164,61.708 142.164,57.328 P3.3@144.043,55.448 ; 81.24,37.948 ccw(c81.24,38.533) R127.1@81.826,38.508 ; R127.1@81.506,37.948 ccw(c81.506,38.522) R127.1@82.079,38.497 ; R127.1@81.572,38.519 cw(c80.975,38.545) 80.975,37.948 ; R127.1@81.966,38.532 81.966,38.075 81.839,37.948 80.975,37.948
RMT_DEBUG: R58.2 U1.27 | length 54.7
  Top Layer w0.254: U1.27@37.673,42.579 37.673,34.415 39.982,32.106 v1(49.149,32.106) ; v1@49.027,31.983 ccw(c48.731,31.688) 48.731,32.106 ccw(c48.731,32.523) v1@49.027,32.228 ; v1@50.089,44.018 51.005,44.935 55.775,44.935 56.334,45.494 56.334,51.483 57.357,52.506 R58.2@57.531,52.506 ; v1@50.114,44.191 ccw(c50.114,44.548) 50.366,44.296 ; v1@50.287,44.018 cw(c50.766,44.018) 50.427,44.357 ; 56.354,51.502 cw(c57.432,50.424) R58.2@57.432,51.949 ; 56.495,51.644 ccw(c55.617,52.522) R58.2@56.859,52.522 ; R58.2@56.787,51.936 cw(c57.432,51.291) R58.2@57.432,52.203
  Bottom Layer w0.254: v1@49.027,32.228 ccw(c48.731,32.523) 49.149,32.523 ccw(c49.567,32.523) v1@49.271,32.228 ; v1@49.149,32.08 49.149,34.061 49.808,34.72 49.808,43.737 ; 49.808,42.861 cw(c51.272,42.861) v1@50.237,43.896 ; 49.808,43.474 cw(c50.658,43.474) v1@50.057,44.075 ; 49.837,43.766 ccw(c49.585,44.018) v1@49.941,44.018 ; v1@50.101,43.846 ccw(c50.072,43.473) 49.808,43.737 ; v1(50.114,44.018) 50.114,44.044 49.808,43.737
RMT_DEBUG_PORT: P3.18 R39.1 R41.2 | length 72.8
  Top Layer w0.254: R41.2@132.65,65.968 132.717,65.968 133.733,64.952 ; R41.2@132.671,65.6 cw(c132.726,64.739) R41.2@133.336,65.349 ; R41.2@132.687,65.346 cw(c132.774,63.994) 133.733,64.952 ; R41.2@133.223,65.918 ccw(c134.324,65.918) 133.546,65.139 ; 133.986,64.952 cw(c133.986,61.658) R39.1@136.315,63.987 ; v1@134.193,61.54 ccw(c133.893,61.839) 134.317,61.839 ; 134.315,64.897 134.315,62.719 134.317,62.717 v1@134.317,61.371 ; 134.317,61.831 ccw(c134.729,61.831) v1@134.438,61.54 ; 134.599,64.952 cw(c134.599,62.271) R39.1@136.495,64.167 ; 135.213,64.952 cw(c135.213,62.884) R39.1@136.675,64.346 ; 135.826,64.952 cw(c135.826,63.498) R39.1@136.854,64.526 ; R39.1@136.035,64.952 133.733,64.952 ; R39.1@136.578,64.266 R39.1@136.755,64.266 ; R39.1@136.721,64.342 R39.1@136.721,64.927
  Bottom Layer w0.254: v1@134.193,61.295 cw(c133.893,60.995) 134.317,60.995 ; 134.317,61.004 cw(c134.729,61.004) v1@134.438,61.295 ; v1@134.317,61.421 134.317,51.865 134.823,51.359 138.303,51.359 138.985,50.677 138.985,46.24 140.151,45.073 140.151,29.619 140.972,28.799 140.972,23.062 140.97,23.06 140.97,22.84 142.062,21.748 142.062,19.888 P3.18@143.95,18 ; 142.852,19.099 ccw(c144,20.247) P3.18@144,18.623 ; 142.972,18.979 cw(c141.993,18) P3.18@143.377,18 ; 143.285,18.665 ccw(c144,19.38) P3.18@144,18.369 ; 143.405,18.545 cw(c142.86,18) P3.18@143.631,18
  other v1: 134.315,61.417
RS232_RXD: P4.2 U27.13 | length 68.2
  Top Layer w0.254: v1@21.533,4.794 ccw(c22.029,5.291) 22.029,4.588 ; v1(21.59,4.851) 21.853,4.588 ; v1@21.605,4.679 cw(c21.631,4.367) 21.853,4.588 ; v1@21.712,4.974 ccw(c22.643,5.904) 22.643,4.588 ; v1@21.762,4.837 ccw(c22.075,4.81) 21.853,4.588 ; 26.821,5.002 cw(c27.204,4.62) U27.13@27.204,5.161 ; 26.945,5.126 ccw(c26.737,5.334) U27.13@27.031,5.334 ; U27.13@28.004,5.334 27.153,5.334 26.407,4.588 21.853,4.588
  Bottom Layer w0.254: P4.2@3.937,45.009 4.851,44.094 ; P4.2@3.973,44.652 cw(c4.034,44.036) 4.472,44.474 ; P4.2@3.998,44.4 cw(c4.102,43.345) 4.851,44.094 ; P4.2@4.303,44.976 ccw(c4.92,44.904) 4.481,44.465 ; P4.2@4.556,44.947 ccw(c5.582,44.825) 4.851,44.094 ; v1@21.417,4.851 ccw(c20.999,4.851) 21.295,5.147 ccw(c21.59,5.442) v1@21.59,5.024 ; v1@21.641,4.699 21.641,4.801 v1(21.59,4.851) 20.168,6.274 17.399,6.274 17.085,6.588 17.085,16.051 17.032,16.105 17.032,16.661 17.085,16.715 17.085,21.878 15.723,23.241 8.534,23.241 7.899,23.876 7.899,43.459 7.264,44.094 4.851,44.094
RS232_TXD: P4.1 U27.14 | length 67.3
  Top Layer w0.254: v1(21.641,3.734) 21.996,4.089 27.127,4.089 27.153,4.064 U27.14@28.004,4.064 ; v1@21.641,3.907 ccw(c21.641,4.324) 21.936,4.029 ccw(c22.231,3.734) v1@21.814,3.734 ; 26.725,4.089 cw(c26.725,3.585) U27.14@27.081,3.942 ; 26.847,4.089 ccw(c26.847,4.42) U27.14@27.081,4.186
  Bottom Layer w0.254: P4.1@3.912,42.545 3.962,42.545 5.013,43.595 6.925,43.595 7.4,43.12 7.4,23.669 8.328,22.742 15.516,22.742 16.586,21.672 16.586,16.921 16.533,16.868 16.533,15.898 16.586,15.845 16.586,6.381 17.192,5.775 19.6,5.775 v1(21.641,3.734) ; P4.1@3.937,42.889 ccw(c3.937,43.779) 4.567,43.15 ccw(c5.197,42.52) P4.1@4.306,42.52 ; P4.1@3.937,43.143 ccw(c3.937,44.647) 5.001,43.583 ccw(c6.064,42.52) P4.1@4.56,42.52 ; v1@21.468,3.734 ccw(c21.05,3.734) 21.345,4.029 ccw(c21.641,4.324) v1@21.641,3.907
RTCX1: C3.1 U1.13 Y2.1 | length 29.9
  Top Layer w0.254: C3.1@17.385,49.431 ccw(c18.556,50.601) 18.556,48.946 ; C3.1@17.565,49.61 ccw(c19.169,51.215) 19.169,48.946 ; C3.1@17.653,49.759 18.466,48.946 ; C3.1@17.745,49.79 ccw(c19.782,51.828) 19.782,48.946 ; C3.1@17.834,49.11 cw(c18.011,48.491) 18.466,48.946 ; C3.1@17.924,49.97 ccw(c20.396,52.441) 20.396,48.946 ; C3.1@18.104,50.149 ccw(c21.009,53.054) 21.009,48.946 ; C3.1@18.274,49.584 ccw(c18.964,49.444) 18.466,48.946 ; Y2.1@21.645,48.823 ccw(c21.35,48.528) 21.35,48.946 ccw(c21.35,49.363) Y2.1@21.645,49.068 ; Y2.1@21.89,48.823 cw(c22.185,48.528) 22.185,48.946 cw(c22.185,49.363) Y2.1@21.89,49.068 ; U1.13@32.823,47.929 25.757,47.929 24.74,48.946 18.466,48.946
RTCX2: C4.1 U1.15 Y2.2 | length 18.7
  Top Layer w0.254: C4.1@17.855,47.488 ccw(c18.05,48.193) 18.567,47.676 ; C4.1@17.983,46.66 17.983,47.092 18.567,47.676 ; C4.1@18.308,46.95 cw(c19.203,47.04) 18.567,47.676 ; Y2.2@21.645,47.553 ccw(c21.35,47.258) 21.35,47.676 ccw(c21.35,48.093) Y2.2@21.645,47.798 ; Y2.2@21.768,47.503 cw(c21.768,47.085) 22.063,47.38 cw(c22.358,47.676) Y2.2@21.941,47.676 ; U1.15@32.823,46.929 22.515,46.929 Y2.2@21.768,47.676 18.567,47.676
SYS_RESET: P1.4 R4.1 U1.14 U6.2 | length 88.7
  Top Layer w0.254: P1.4@3.613,27.908 4.636,28.931 8.458,28.931 11.659,32.131 v1@21.565,32.131 ; P1.4@3.613,28.381 ccw(c3.613,29.523) 4.421,28.715 ccw(c5.228,27.908) P1.4@4.086,27.908 ; v1@18.115,9.682 cw(c17.82,9.387) 18.237,9.387 cw(c18.655,9.387) v1@18.36,9.682 ; v1(18.237,9.804) 18.237,9.119 18.669,8.687 ; 18.824,8.687 cw(c18.824,7.682) R4.1@19.535,8.393 ; 19.141,8.687 ccw(c19.141,9.325) R4.1@19.674,8.973 ; R4.1@19.462,9.113 cw(c18.669,9.636) 18.669,8.687 ; U6.2@19.997,3.922 20.178,3.922 20.371,4.115 20.371,4.801 21.514,5.944 21.514,8.179 21.006,8.687 ; U6.2@20.238,4.087 ccw(c19.918,4.407) 20.371,4.407 ; 20.371,4.443 ccw(c20.874,4.443) U6.2@20.518,4.087 ; R4.1@20.486,8.438 cw(c21.006,8.019) 21.006,8.687 ; R4.1@20.58,8.988 ccw(c21.006,9.138) 21.006,8.687 ; 21.035,32.131 ccw(c21.035,32.635) v1@21.391,32.279 ; 21.157,32.131 cw(c21.157,31.8) v1@21.391,32.034 ; v1(24.511,47.803) 25.177,47.803 25.551,47.429 U1.14@32.823,47.429 ; v1@24.633,47.68 cw(c24.929,47.385) 24.929,47.803 cw(c24.929,48.22) v1@24.633,47.925 ; 18.669,8.687 21.006,8.687
  Bottom Layer w0.254: v1@18.115,9.927 ccw(c17.82,10.222) 18.237,10.222 ccw(c18.655,10.222) v1@18.36,9.927 ; v1(18.237,9.804) 18.237,15.494 19.163,16.42 19.163,17.5 19.126,17.537 19.126,20.879 21.488,23.241 21.488,35.509 24.573,38.594 24.573,47.74 v1(24.511,47.803) ; v1@21.391,32.034 cw(c21.157,31.8) 21.488,31.8 ; v1@21.391,32.279 ccw(c21.157,32.513) 21.488,32.513 ; 21.488,31.677 cw(c21.993,31.677) v1@21.636,32.034 ; 21.488,32.635 ccw(c21.993,32.635) v1@21.636,32.279 ; v1@24.389,47.68 cw(c23.943,47.234) 24.573,47.234
  other v1: 21.514,32.156
USB_CONNECT: U1.49 USB1.5 | length 97.5
  Top Layer w0.254: U1.49@46.023,48.429 48.937,48.429 49.124,48.616 v1@49.225,48.616 ; v1@48.565,20.091 49.225,20.091 49.804,20.67 57.974,20.67 62.95,15.694 62.95,12.57 65.309,10.211 93.066,10.211 93.193,10.084 USB1.5@93.193,2.642 ; v1@48.713,19.994 cw(c48.947,19.76) 48.947,20.091 ; v1@48.713,20.239 ccw(c49.069,20.596) 49.069,20.091 ; USB1.5@92.752,3.105 ccw(c91.689,4.168) 93.193,4.168 ccw(c94.697,4.168) USB1.5@93.633,3.105 ; USB1.5@92.932,2.925 ccw(c92.302,3.555) 93.193,3.555 ccw(c94.083,3.555) USB1.5@93.454,2.925
  Bottom Layer w0.254: 48.208,20.448 ccw(c48.59,20.83) v1@48.59,20.29 ; 48.331,20.325 cw(c48.122,20.117) v1@48.417,20.117 ; v1@48.59,20.066 47.927,20.729 47.927,36.009 48.311,36.393 48.311,45.968 49.306,46.964 49.306,48.458 v1(49.124,48.641) ; v1@49.001,48.519 cw(c48.265,47.783) 49.306,47.783 ; v1@49.181,48.698 cw(c48.878,48.396) 49.306,48.396
  other v1: 48.59,20.117
USB_D+: U1.22 USB1.3 | length 96.4
  Top Layer w0.254: U1.22@35.173,42.579 35.173,40.545 35.662,40.056 35.662,33.503 ; v1@35.26,33.346 ccw(c34.29,34.315) 35.662,34.315 ; v1(35.382,33.223) 35.662,33.503 ; v1@35.389,33.396 ccw(c35.404,33.76) 35.662,33.503 ; v1@35.439,33.166 ccw(c34.903,33.702) 35.662,33.702 ; v1@35.555,33.23 cw(c35.919,33.245) 35.662,33.503 ; v1@37.198,18.174 37.837,17.535 38.581,17.535 38.634,17.588 59.557,17.588 61.952,15.193 61.952,12.156 64.964,9.144 87.986,9.144 88.113,9.017 USB1.3@88.113,2.664 ; v1@37.211,17.988 cw(c37.211,17.57) 37.506,17.866 cw(c37.802,18.161) v1@37.384,18.161 ; USB1.3@87.672,3.105 ccw(c86.609,4.168) 88.113,4.168 ccw(c89.617,4.168) USB1.3@88.553,3.105 ; USB1.3@87.852,2.925 ccw(c87.222,3.555) 88.113,3.555 ccw(c89.003,3.555) USB1.3@88.374,2.925
  Bottom Layer w0.254: v1@35.26,33.101 cw(c34.965,32.806) 35.382,32.806 cw(c35.8,32.806) v1@35.505,33.101 ; v1(35.382,33.223) 35.382,32.029 35.594,31.817 35.594,21.725 37.211,20.108 v1(37.211,18.161) ; v1@37.089,18.283 ccw(c36.793,18.579) 37.211,18.579 ccw(c37.629,18.579) v1@37.333,18.283
USB_D-: U1.23 USB1.4 | length 96.4
  Top Layer w0.254: U1.23@35.673,42.579 35.673,40.934 36.161,40.446 36.161,33.512 36.297,33.376 36.297,32.842 36.271,32.817 v1(36.271,32.69) ; v1@36.149,32.812 ccw(c35.792,33.169) 36.297,33.169 ; 36.297,33.046 ccw(c36.628,33.046) v1@36.394,32.812 ; v1@37.922,18.699 cw(c37.922,18.282) 38.218,18.577 cw(c38.513,18.872) v1@38.095,18.872 ; v1(37.922,18.872) 38.707,18.087 59.764,18.087 62.451,15.4 62.451,12.363 65.137,9.677 90.526,9.677 90.653,9.55 USB1.4@90.653,2.664 ; USB1.4@90.212,3.105 ccw(c89.149,4.168) 90.653,4.168 ccw(c92.157,4.168) USB1.4@91.093,3.105 ; USB1.4@90.392,2.925 ccw(c89.762,3.555) 90.653,3.555 ccw(c91.543,3.555) USB1.4@90.914,2.925
  Bottom Layer w0.254: v1@36.149,32.567 cw(c35.854,32.272) 36.271,32.272 cw(c36.689,32.272) v1@36.394,32.567 ; v1@36.271,32.817 36.271,21.753 37.922,20.102 v1(37.922,18.872) ; v1@37.8,18.995 ccw(c37.505,19.29) 37.922,19.29 ccw(c38.34,19.29) v1@38.045,18.995
USB_PPWR: U1.26 USB1.2 | length 90.5
  Top Layer w0.254: U1.26@37.173,42.579 37.173,34.201 37.922,33.452 37.922,32.715 37.897,32.69 v1(37.897,32.664) ; v1@37.774,32.787 ccw(c37.418,33.143) 37.922,33.143 ; 37.922,33.021 ccw(c38.253,33.021) v1@38.019,32.787 ; v1(38.913,16.916) 38.971,16.975 59.465,16.975 61.453,14.986 61.453,11.949 64.767,8.636 85.471,8.636 85.573,8.534 USB1.2@85.573,2.664 ; v1@39.035,16.794 cw(c39.471,16.358) 39.471,16.975 ; USB1.2@85.132,3.105 ccw(c84.069,4.168) 85.573,4.168 ccw(c87.077,4.168) USB1.2@86.013,3.105 ; USB1.2@85.312,2.925 ccw(c84.682,3.555) 85.573,3.555 ccw(c86.463,3.555) USB1.2@85.834,2.925
  Bottom Layer w0.254: v1@37.774,32.542 cw(c37.479,32.247) 37.897,32.247 cw(c38.314,32.247) v1@38.019,32.542 ; v1@37.897,32.69 37.897,20.93 38.913,19.914 v1(38.913,16.916) ; v1@38.79,17.039 ccw(c38.495,17.334) 38.913,17.334 ccw(c39.33,17.334) v1@39.035,17.039
USB_UP_LED: U1.25 USB1.6 | length 101.1
  Top Layer w0.254: U1.25@36.673,42.579 36.673,33.736 v1(37.084,33.325) ; v1@36.911,33.325 ccw(c36.493,33.325) 36.789,33.62 ccw(c37.084,33.915) v1@37.084,33.498 ; v1@37.084,21.9 cw(c37.084,21.543) 37.336,21.795 ; v1@37.084,22.047 37.49,21.641 41.504,21.641 43.129,20.015 45.644,20.015 46.797,21.169 58.181,21.169 63.449,15.9 63.449,12.776 65.516,10.71 95.615,10.71 95.733,10.592 USB1.6@95.733,2.718 ; v1@37.257,22.073 ccw(c37.736,22.073) 37.397,21.734 ; USB1.6@95.292,3.105 ccw(c94.229,4.168) 95.733,4.168 ccw(c97.237,4.168) USB1.6@96.173,3.105 ; USB1.6@95.472,2.925 ccw(c94.842,3.555) 95.733,3.555 ccw(c96.623,3.555) USB1.6@95.994,2.925
  Bottom Layer w0.254: v1@36.962,22.195 ccw(c36.666,22.49) 37.084,22.49 ccw(c37.502,22.49) v1@37.206,22.195 ; v1@36.962,33.202 cw(c36.666,32.907) 37.084,32.907 cw(c37.502,32.907) v1@37.206,33.202 ; v1(37.084,22.073) v1@37.084,33.299
VBAT: BT1.1 U1.16 | length 32.3
  Top Layer w0.254: 29.464,46.253 29.639,46.429 U1.16@32.823,46.429
  Top Layer w0.508: v1(23.52,46.253) 23.546,46.279 23.571,46.253 29.464,46.253
  Bottom Layer w0.508: BT1.1@12.992,55.105 12.992,54.496 15.697,51.791 23.19,51.791 23.52,51.46 23.52,46.304 23.546,46.279 v1(23.52,46.253) ; BT1.1@13,53.804 cw(c13,52.153) 14.167,53.32 ; BT1.1@13.488,54.8 ccw(c15.42,54.8) 14.054,53.434 ; BT1.1@13.996,54.8 ccw(c17.154,54.8) 14.921,52.567
VBUS: U1.18 USB1.1 | length 123
  Top Layer w0.254: v1(18.466,17.221) 36.982,17.221 38.075,16.129 46.203,16.129 46.549,16.476 59.258,16.476 60.954,14.78 60.954,11.743 64.62,8.077 82.906,8.077 83.033,7.95 USB1.1@83.033,2.664 ; v1@18.588,17.099 cw(c18.883,16.804) 18.883,17.221 cw(c18.883,17.639) v1@18.588,17.344 ; v1(20.777,44.755) 21.082,45.06 30.059,45.06 30.428,45.429 U1.18@32.823,45.429 ; v1@20.777,44.928 ccw(c20.777,45.345) 21.073,45.05 ccw(c21.368,44.755) v1@20.95,44.755 ; USB1.1@82.592,3.105 ccw(c81.529,4.168) 83.033,4.168 ccw(c84.537,4.168) USB1.1@83.473,3.105 ; USB1.1@82.772,2.925 ccw(c82.142,3.555) 83.033,3.555 ccw(c83.923,3.555) USB1.1@83.294,2.925
  Bottom Layer w0.254: v1@18.343,17.344 ccw(c18.048,17.639) 18.466,17.639 ccw(c18.883,17.639) v1@18.588,17.344 ; v1@18.466,17.196 18.466,21.158 20.777,23.47 v1(20.777,44.755) ; v1@20.655,44.632 cw(c20.36,44.337) 20.777,44.337 cw(c21.195,44.337) v1@20.9,44.632
VREFP: C13.2 C17.2 C19.2 LR2.2 U1.8 U1.10 | length 38.5
  Top Layer w0.254: 29.489,50.216 29.439,50.165 29.515,50.089 30.912,50.089 31.572,49.429 U1.10@32.823,49.429 ; 29.619,50.345 29.639,50.345 29.743,50.241 30.861,50.241 31.048,50.428 U1.8@32.822,50.428
  Top Layer w0.508: LR2.2@23.447,55.163 ccw(c23.233,55.982) v1(24.079,55.982) 24.079,54.99 LR2.2@23.572,54.483 ; LR2.2@23.575,54.671 ccw(c23.405,55.324) LR2.2@24.079,55.324 ; C19.2@26.295,51.771 ccw(c25.389,52.677) 26.67,52.677 ; 26.67,52.558 ccw(c27.783,52.558) C19.2@26.996,51.771 ; C17.2@27.828,58.313 ccw(c27.435,58.706) C17.2@27.991,58.706 ; C13.2@27.828,60.508 cw(c27.435,60.116) C13.2@27.991,60.116 ; 27.991,59.208 cw(c29.83,59.208) C13.2@28.53,60.508 ; 27.991,59.613 ccw(c29.83,59.613) C17.2@28.53,58.313 ; C13.2@27.991,60.528 27.991,57.277 26.67,55.956 26.67,51.867 28.321,50.216 29.489,50.216 ; C17.2@28.042,57.734 28.067,57.709 v1(29.54,57.709) cw(c29.54,58.965) C17.2@28.564,58.174 ; C17.2@28.53,57.511 cw(c29.006,57.034) 29.006,57.709
  Bottom Layer w0.508: v1(24.079,55.982) 24.079,56.007 25.781,57.709 v1(29.54,57.709) v1@29.566,57.709
VREG: C9.2 C14.2 C27.2 LR1.2 U1.34 U1.67 | length 60.6
  Top Layer w0.254: v1@40.492,53.488 ccw(c40.197,53.783) 40.615,53.783 ccw(c41.032,53.783) v1@40.737,53.488 ; v1(40.615,53.365) 40.615,54.102 41.172,54.659 41.172,57.149 41.631,57.607 41.631,58.344 42.305,59.018 42.315,59.018 42.709,59.412 42.709,59.422 42.977,59.69 ; 40.978,54.465 ccw(c40.565,54.879) U1.67@41.15,54.879 ; 41.707,44.729 41.173,44.195 41.173,39.498 42.672,37.998 42.672,37.801 ; C9.2@42.742,37.326 ccw(c42.387,37.516) 42.672,37.801 ; C9.2@43.106,37.368 42.672,37.801 ; C9.2@43.177,37.645 cw(c43.073,38.202) 42.672,37.801
  Top Layer w0.508: LR1.2@23.47,57.658 24.409,58.598 ; LR1.2@23.534,58.011 cw(c24.167,57.964) LR1.2@24.167,58.598 ; LR1.2@23.74,58.467 ccw(c23.978,59.03) 24.409,58.598 ; LR1.2@24.041,57.973 cw(c24.714,57.923) v1(24.714,58.598) 24.409,58.598 ; LR1.2@24.042,58.01 cw(c24.574,58.01) LR1.2@24.198,58.387 ; LR1.2@24.115,58.304 cw(c24.714,57.705) v1@24.714,58.552 ; v1(40.615,48.311) 40.615,46.736 41.707,45.644 41.707,44.729 ; 42.977,59.69 43.231,59.69 ; C14.2@43.538,60.481 cw(c42.487,60.434) 43.231,59.69 ; C14.2@44.022,60.008 ccw(c43.998,58.922) 43.231,59.69 ; C14.2@44.044,60.503 43.231,59.69
  Bottom Layer w0.508: v1(24.714,58.598) 38.913,58.598 40.589,56.921 v1@40.589,53.289 ; C27.2@37.653,49.2 40.615,49.2 ; C27.2@38.004,48.849 cw(c38.85,48.002) 38.85,49.2 cw(c38.85,50.397) C27.2@38.004,49.551 ; v1(40.615,48.311) v1(40.615,53.365)
XTAL1: C1.1 U1.19 Y1.1 | length 26.8
  Top Layer w0.254: C1.1@17.767,42.075 18.669,42.977 ; C1.1@17.782,42.509 ccw(c17.934,43.086) C1.1@18.356,42.664 ; C1.1@17.847,42.754 ccw(c18.064,43.581) 18.669,42.977 ; C1.1@18.312,42.152 cw(c19.44,42.152) 18.642,42.95 ; Y1.1@21.591,42.572 ccw(c20.613,41.593) 20.613,42.977 ccw(c20.613,44.36) Y1.1@21.591,43.382 ; Y1.1@21.771,42.751 ccw(c21.226,42.207) 21.226,42.977 ccw(c21.226,43.747) Y1.1@21.771,43.202 ; Y1.1@21.996,42.404 cw(c21.996,40.898) 23.061,41.963 ; Y1.1@21.996,42.658 cw(c21.996,41.765) 22.628,42.396 ; Y1.1@22.569,42.977 ccw(c23.83,42.977) 22.939,42.085 ; U1.19@32.823,44.929 30.634,44.929 26.413,40.707 24.317,40.707 22.009,43.015 21.971,42.977 18.669,42.977
XTAL2: C2.1 U1.20 Y1.2 | length 37.9
  Top Layer w0.254: C2.1@17.411,38.501 ccw(c18.685,39.775) 18.685,37.973 ; C2.1@17.59,38.68 ccw(c19.298,40.388) 19.298,37.973 ; C2.1@17.678,38.786 18.491,37.973 ; C2.1@17.77,38.86 ccw(c19.912,41.002) 19.912,37.973 ; C2.1@17.821,38.17 cw(c17.976,37.457) 18.491,37.973 ; C2.1@17.95,39.04 ccw(c20.525,41.615) 20.525,37.973 ; C2.1@18.129,39.219 ccw(c21.138,42.228) 21.138,37.973 ; C2.1@18.297,38.643 ccw(c19.003,38.485) 18.491,37.973 ; 20.429,37.973 cw(c20.429,36.329) Y1.2@21.591,37.492 ; 20.797,37.973 ccw(c20.797,39.096) Y1.2@21.591,38.302 ; 21.042,37.973 cw(c21.042,36.943) Y1.2@21.771,37.671 ; Y1.2@21.996,38.216 ccw(c21.996,39.047) 22.584,38.459 ; Y1.2@21.996,38.47 ccw(c21.996,39.914) 23.018,38.893 ; Y1.2@22.315,37.897 cw(c23.024,37.897) 22.523,38.398 ; Y1.2@22.569,37.897 cw(c23.891,37.897) 22.957,38.832 ; U1.20@32.823,44.429 30.84,44.429 26.619,40.208 24.333,40.208 22.022,37.897 21.946,37.973 18.491,37.973
pads on no net: K1.3 K1.4 K2.3 K2.4 K3.3 K3.4 K4.3 K4.4 K5.3 K5.4 K6.3 K6.4 RV1.1 S1.3 S1.4 U4.4 U24.1 U24.4 U25.1 U25.4 U26.5 U27.7 U27.8 U27.9 U27.10 U28.4

## Polygon pours and split planes (outlines as drawn)
GND on Top Layer "Top Layer-GND" (solid, remove dead copper, pour order 6): -0.015,-0.173 -0.066,-0.122 -0.066,74.808 75.22,74.808 75.22,22.916 119.899,22.916 119.899,2.723 132.497,2.723 132.497,6.431 132.497,6.533 137.983,12.019 137.983,18.623 141.082,18.623 141.082,37.902 147.991,37.902 147.991,-0.173
GNDA on Top Layer "Top Layer-GND" (solid, remove dead copper, pour order 8): 77.186,75.166 77.186,26.423 122.195,26.423 122.195,4.097 131.974,4.097 131.974,6.789 137.41,12.225 137.41,15.374 137.41,20.175 140.508,20.175 140.508,40.469 140.559,40.52 148.56,40.52 148.56,75.039 148.586,75.064
GND on Bottom Layer "Top Layer-GND" (solid, remove dead copper, pour order 12): -0.287,0.135 -0.236,0.186 -0.236,75.116 72.56,75.116 72.611,75.167 72.56,75.116 72.56,25.332 118.915,25.332 118.94,25.357 119.601,24.697 119.601,3.107 132.301,3.107 132.529,3.335 132.529,7.171 132.529,7.272 137.736,12.479 137.736,18.88 140.784,18.88 141.267,19.363 141.267,38.337 147.719,38.337 147.693,38.311 147.693,0.135
GNDA on Bottom Layer "Top Layer-GND" (solid, remove dead copper, pour order 14): 74.654,75.364 74.654,26.596 74.68,26.57 74.781,26.469 122.355,26.469 122.355,4.421 122.381,4.447 132.109,4.447 132.109,7.038 137.697,12.626 137.697,20.474 140.669,20.474 140.669,40.769 148.771,40.769 148.771,75.44

## Keep-outs
Keep-Out Layer:
  lines w0.254: 0.5,6 3,6 cw(c3,2) 7,2 7,0 141,0 141,2 cw(c145,2) 145,6 147.5,6 147.5,69 141,69 141,75 7,75 7,73 cw(c3,73) 3,69 0.5,69 0.5,6

## Dimensions
136.5,5 to 147.5,6 on Mechanical 15
7,2 to 141,2 on Mechanical 15
0.5,6 to 0.5,69 on Mechanical 15
11.5,5 to 0.5,6 on Mechanical 15
0.5,6 to 7,0 on Mechanical 15
7,0 to 7,75 on Mechanical 15
0.5,6 to 147.5,6 on Mechanical 15
147.5,6 to 147.5,69 on Mechanical 15

## Text inside footprints (layer, text, board x,y; h text height)
P1: Top Overlay "2" at 1.549,25.527 h0.8 r90; Top Overlay "1" at 8.661,25.654 h0.8 r90; Top Overlay "9" at 8.661,33.655 h0.8 r90; Top Overlay "10" at 1.549,33.02 h0.8 r90